# Altium PCB PCB_TUD-EHC-CrankModule_SMARTEST.pcbdoc
Units mm, origin at the board's own origin, x right, y up, seen from the top; angles counter-clockwise.
Board outline 83.4 x 42 mm, 2 copper layers (Top Layer, Bottom Layer); 64 components, 35 nets, 193 pads, 200 vias.
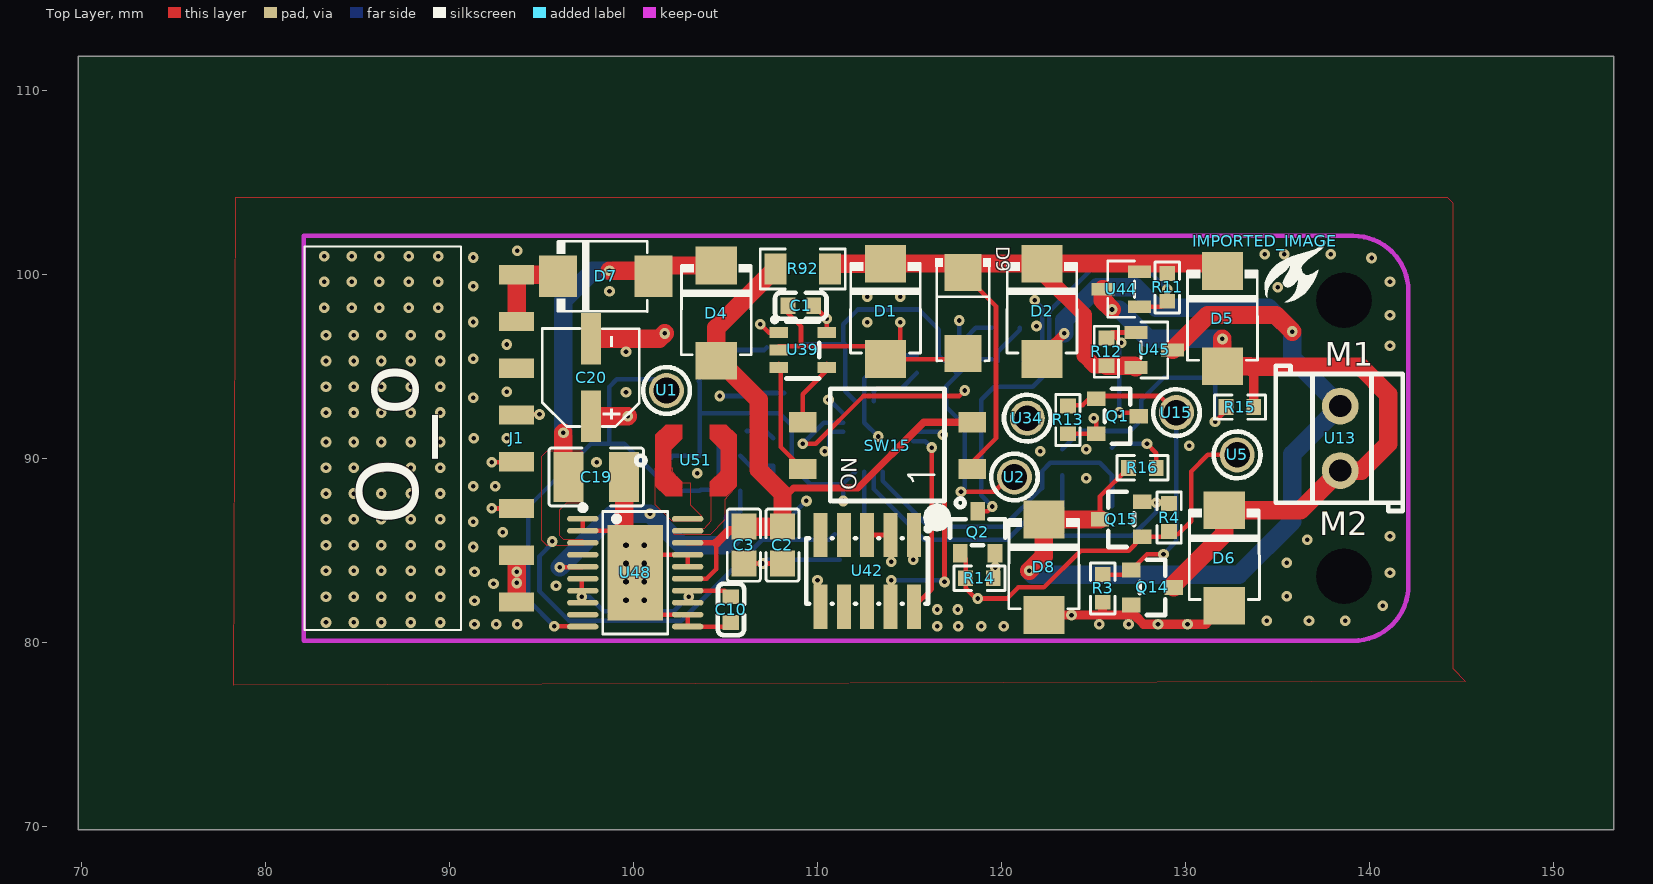
[diagram p0: Top Layer view]
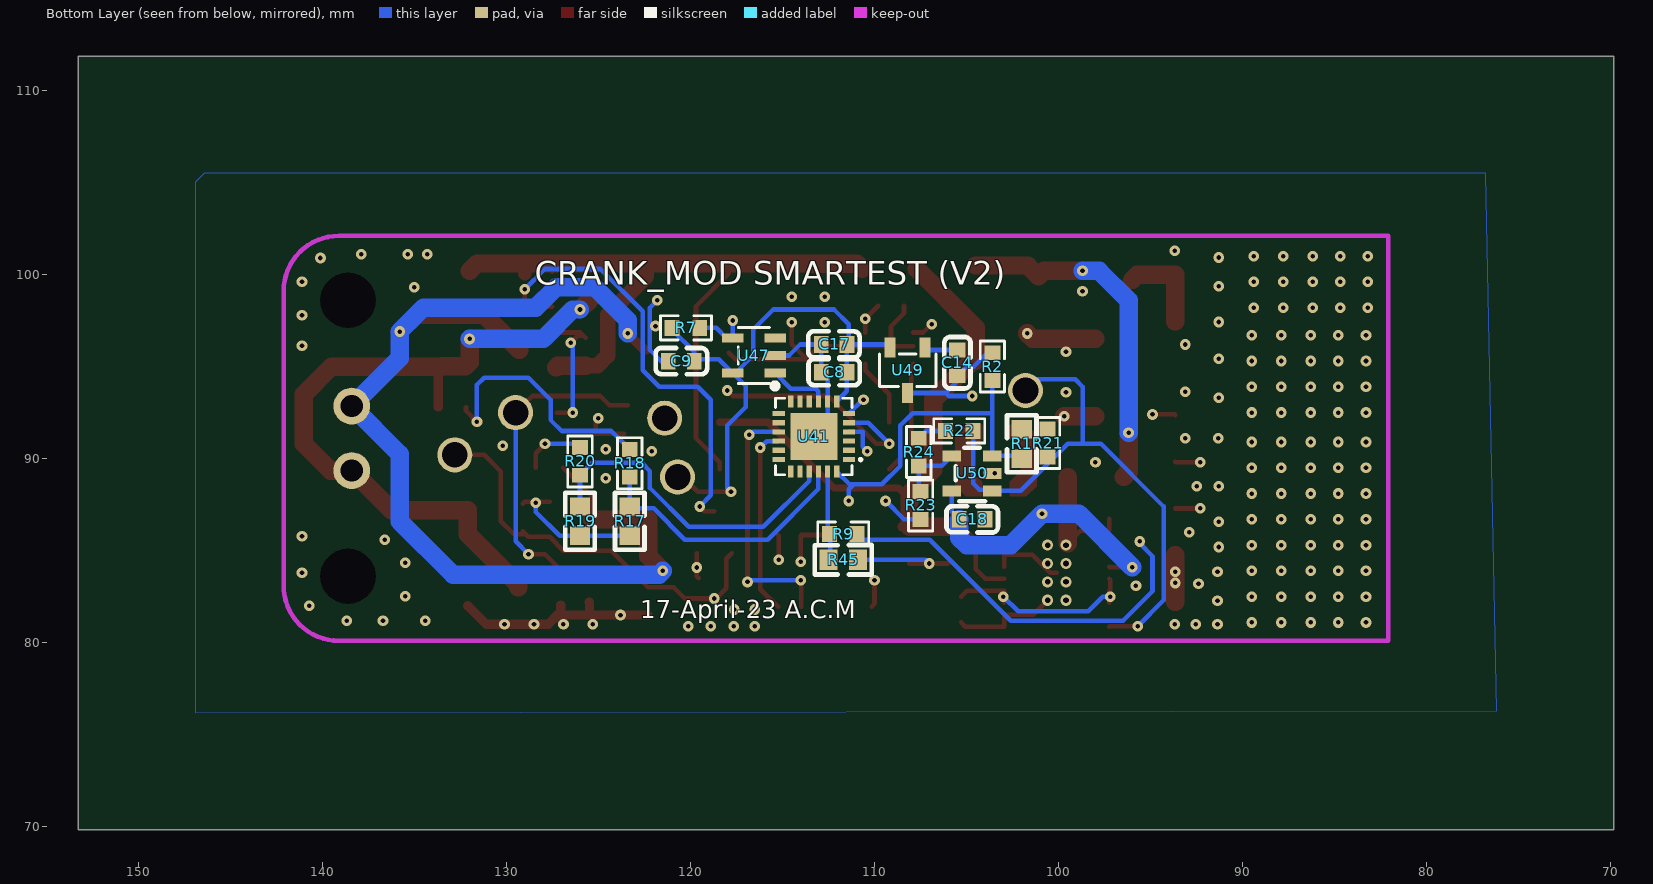
[diagram p1: Bottom Layer view, seen from below]

## Layer stack, top to bottom
Top Layer: signal copper (thickness not stored)
Dielectric: dielectric 0.32, FR-4, Dk 4.8
Bottom Layer: signal copper (thickness not stored)

## Board outline
153.25,69.85 69.85,69.85 69.85,111.85 153.25,111.85
cut-out: 140.1,98.6 ccw(c138.6,98.6) 137.1,98.6 ccw(c138.6,98.6)
cut-out: 140.1,83.6 ccw(c138.6,83.6) 137.1,83.6 ccw(c138.6,83.6)

## Components (designator, comment, footprint, x,y, rotation, side; value= is the part's Value field where it differs from the comment)
C1 "100nF" C0603 109.1,98.3 r0 top
C2 "CL21A226MAQNNNE_C45783" C0805 108.1,85.3 r90 top
C3 "CL21A226MAQNNNE_C45783" C0805 106,85.3 r90 top
C8 "100nF" C0603 112.2,94.7 r0 bottom
C9 "100nF" C0603 120.5,95.3 r0 bottom
C10 "100nF" C0603 105.3,81.8 r270 top
C14 "CL10A106MA8NRNC" C0603 105.5,95.2 r270 bottom
C17 "CL10A105KB8NNNC" C0603 112.2,96.2 r180 bottom
C18 "100nF" C0603 104.7,86.7 r0 bottom
C19 "CL32A107MQVNNNE" C1210 97.983,89 r180 top
C20 "EEEFK1A121SR" CAP-SMD_BD5.0-L5.3-W5.3-FD 97.7,94.4 r90 top
D1 "STPS1L30U" SMB_L4.3-W3.6-LS5.4-RD 113.7,98 r270 top
D2 "STPS1L30U" SMB_L4.3-W3.6-LS5.4-RD 122.2,98 r270 top
D4 "STPS1L30U" SMB_L4.3-W3.6-LS5.4-RD 104.5,97.9 r270 top
D5 "STPS1L30U" SMB_L4.3-W3.6-LS5.4-RD 132,97.6 r270 top
D6 "STPS1L30U" SMB_L4.3-W3.6-LS5.4-RD 132.1,84.6 r270 top
D7 "STPS1L30U" SMB_L4.3-W3.6-LS5.4-RD 98.5,99.9 r0 top
D8 "STPS1L30U" SMB_L4.3-W3.6-LS5.4-RD 122.3,84.1 r270 top
D9 "SMAZ5V6-13-F" SMA_L4.3-W2.6-LS5.2-RD 117.909,97.909 r270 top
IMPORTED_IMAGE "IMPORTED_IMAGE" IMPORTED_IMAGE 134.3,101.8 r0 top
J1 "SMH-108-02-G-S-TR" SMH-108-02-XX-S-TR 93.657,91.1 r270 top
Q1 "BSS806NEH6327" SOT-23_L2.9-W1.3-P1.90-LS2.4-BR 126.3,92.3 r180 top
Q2 "BSS806NEH6327" SOT-23_L2.9-W1.3-P1.90-LS2.4-BR 118.7,86 r270 top
Q14 "BSS806NEH6327" SOT-23_L2.9-W1.3-P1.90-LS2.4-BR 128.2,83 r180 top
Q15 "BSS806NEH6327" SOT-23_L2.9-W1.3-P1.90-LS2.4-BR 126.5,86.7 r0 top
R1 "20kΩ" R0603#1 102,90.8 r90 bottom
R2 "0603WAF1003T5E" R0603#2 103.6,95 r90 bottom
R3 "0603WAF1003T5E" R0603#2 125.5,82.947 r90 top
R4 "0603WAF1003T5E" R0603#2 129.1,86.8 r270 top
R7 "0603WAF1003T5E" R0603#2 120.247,97.1 r180 bottom
R9 "0603WAF1003T5E" R0603#2 111.7,85.9 r180 bottom
R11 "0603WAF1003T5E" R0603#2 129,99.3 r90 top
R12 "0603WAF1003T5E" R0603#2 125.7,95.8 r270 top
R13 "0603WAF1003T5E" R0603#2 123.6,92.1 r90 top
R14 "0603WAF1003T5E" R0603#2 118.8,83.5 r180 top
R15 "0603WAF1003T5E" R0603#2 132.947,92.8 r180 top
R16 "0603WAF1003T5E" R0603#2 127.653,89.5 r180 top
R17 "20kΩ" R0603#1 123.3,86.6 r270 bottom
R18 "0603WAF1003T5E" R0603#2 123.3,89.747 r90 bottom
R19 "20kΩ" R0603#1 126,86.6 r270 bottom
R20 "0603WAF1003T5E" R0603#2 126,89.847 r90 bottom
R21 "0603WAF1003T5E" R0603#2 100.6,90.847 r90 bottom
R22 "0603WAF1003T5E" R0603#2 105.4,91.5 r0 bottom
R23 "0603WAF1003T5E" R0603#2 107.5,87.453 r270 bottom
R24 "0603WAF1003T5E" R0603#2 107.6,90.353 r270 bottom
R45 "20kΩ" R0603#1 111.7,84.5 r180 bottom
R92 "1206W3F500MT5E_C127691" R1206 109.2,100.3 r0 top
SW15 "A6S-2102-PH" SW-SMD_4P-L6.3-W6.1-P2.54-LS10.0-BL 113.8,90.7 r90 top
U1 "5001" TEST-TH_BD2.54-P1.39 101.8,93.7 r0 top
U2 "5001" TEST-TH_BD2.54-P1.39 120.7,89 r0 top
U5 "5001" TEST-TH_BD2.54-P1.39 132.8,90.2 r0 top
U13 "KF350-3.5-2P" CONN-TH_P3.50_KF350-3.5-2P 138.4,91.1 r90 top
U15 "5001" TEST-TH_BD2.54-P1.39 129.5,92.5 r0 top
U34 "5001" TEST-TH_BD2.54-P1.39 121.4,92.2 r0 top
U39 "INA180A3IDBVR" SOT-23-5_L3.0-W1.7-P0.95-LS2.8-BR 109.2,95.9 r180 top
U41 "NHS3152/A1Z" QFN-24_L4.0-W4.0-P0.50-BL-EP2.6 113.3,91.2 r90 bottom
U42 "20021121-00010T4LF" HDR-SMD_10P-P1.27-V-M-R2-C5-S1.27-LS5.5 112.7,83.9 r180 top
U44 "FDN340P_C3277832" SOT-23-3_L2.9-W1.3-P0.95-LS2.4-BR 126.5,99.2 r0 top
U45 "FDN340P_C3277832" SOT-23-3_L2.9-W1.3-P0.95-LS2.4-BR 128.3,95.9 r180 top
U47 "TPS3825-33DBVT" SOT-23-5_L3.0-W1.7-P0.95-LS2.8-BL 116.554,95.6 r90 bottom
U48 "LTC3106IFE#PBF" TSSOP-20_L6.5-W4.4-P0.65-LS6.4-BL-EP 100.1,83.8 r270 top
U49 "MCP1700T-3302E/TT" SOT-23-3_L2.9-W1.6-P1.90-LS2.8-BR 108.2,94.8 r90 bottom
U50 "MCP6041T-E/OT" SOT-23-5_L2.9-W1.6-P0.95-LS2.8-BR 104.7,89.2 r180 bottom
U51 "Ind-LPS4018" LPS4018-223MRB 103.4,89.9 r0 top

## Footprints (in the part's own frame and the unit in brackets; to place one, negate y for a bottom-side part, rotate by r counter-clockwise, add the part's x,y. Pads: shape width x height; smd on the part's side, far side on the other; paste and mask are expansions set on the pad)
C0603 [mm]
  rect 0.8x0.9 smd paste+0 mask+0.051: 1(-0.7,0) 2(0.7,0)
  silkscreen extent -1.41,-0.71 1.39,0.72
C0805 [mm]
  rect 1.41x1.35 smd paste-100 mask+0.051: 1(-1,0) 2(1,0)
  silkscreen extent -1.96,-0.9 1.96,0.9
C1210 [mm]
  rect 1.635x2.7 smd paste-100 mask+0.051: 1(-1.517,0) 2(1.517,0)
  silkscreen extent -2.56,-1.58 2.56,1.58
CAP-SMD_BD5.0-L5.3-W5.3-FD [mm]
  rect 2.8x1.1 smd paste+0 mask+0.051: 1(-2.1,0) 2(2.1,0)
  silkscreen extent -2.66,-2.62 2.66,2.65
CONN-TH_P3.50_KF350-3.5-2P [mm]
  round 2 hole 1.2 paste+0 mask+0.051: 1(-1.75,0) 2(1.75,0)
  silkscreen extent -3.95,-3.4 3.95,3.5
HDR-SMD_10P-P1.27-V-M-R2-C5-S1.27-LS5.5 [mm]
  rect 0.76x2.4 smd paste+0 mask+0.051: 1(-2.54,-1.95) 2(-2.54,1.95) 3(-1.27,-1.95) 4(-1.27,1.95) 5(0,-1.95) 6(0,1.95) 7(1.27,-1.95) 8(1.27,1.95) 9(2.54,-1.95) 10(2.54,1.95)
  silkscreen extent -3.43,-2.41 3.3,1.78
IMPORTED_IMAGE [mm]
  silkscreen extent 0,-3.3 3.3,0
LPS4018-223MRB [mm]
  Top Layer region: -0.755,-1.945 -1.645,-1.945 -2.205,-1.395 -2.205,1.395 -1.645,1.945 -0.755,1.945 -0.755,1.17 -1.335,0.575 -1.335,-0.575 -0.755,-1.17
  Top Layer region: 0.755,1.945 1.645,1.945 2.205,1.395 2.205,-1.395 1.645,-1.945 0.755,-1.945 0.755,-1.17 1.335,-0.575 1.335,0.575 0.755,1.17
  silkscreen extent -3.25,-0.25 -2.75,0.25
QFN-24_L4.0-W4.0-P0.50-BL-EP2.6 [mm]
  rect 0.28x0.665 smd paste-100 mask+0.05: 1(-1.25,-1.908) 2(-0.75,-1.908) 3(-0.25,-1.908) 4(0.25,-1.908) 5(0.75,-1.908) 6(1.25,-1.908) 13(1.25,1.908) 14(0.75,1.908) 15(0.25,1.908) 16(-0.25,1.908) 17(-0.75,1.908) 18(-1.25,1.908)
  rect 0.665x0.28 smd paste-100 mask+0.05: 7(1.908,-1.25) 8(1.908,-0.75) 9(1.908,-0.25) 10(1.908,0.25) 11(1.908,0.75) 12(1.908,1.25) 19(-1.908,1.25) 20(-1.908,0.75) 21(-1.908,0.25) 22(-1.908,-0.25) 23(-1.908,-0.75) 24(-1.908,-1.25)
  rect 2.55x2.55 smd paste-100 mask+0.05: 25(0,0)
  silkscreen extent -2.08,-2.61 2.08,2.08
R0603#1 [mm]
  rect 1x1.1 smd paste+0 mask+0.051: 1(-0.8,0) 2(0.8,0)
  silkscreen extent -1.55,-0.8 1.55,0.81
R0603#2 [mm]
  rect 0.806x0.864 smd paste-100 mask+0.051: 1(-0.753,0) 2(0.753,0)
  silkscreen extent -1.39,-0.66 1.39,0.66
R1206 [mm]
  rect 1.208x1.701 smd paste-100 mask+0.051: 1(-1.479,0) 2(1.479,0)
  silkscreen extent -2.31,-1.08 2.31,1.08
SMA_L4.3-W2.6-LS5.2-RD [mm]
  rect 2x2 smd paste+0 mask+0.051: 1(-2.2,0) 2(2.2,0)
  silkscreen extent -2.98,-1.5 2.6,1.5
SMB_L4.3-W3.6-LS5.4-RD [mm]
  rect 2.047x2.241 smd paste+0 mask+0.051: 1(-2.591,0) 2(2.591,0)
  silkscreen extent -2.67,-1.91 2.26,1.91
SMH-108-02-XX-S-TR [mm]
  rect 1.04x1.91 smd paste+0 mask+0.051: 1(-8.89,0) 2(-6.35,0) 3(-3.81,0) 4(-1.27,0) 5(1.27,0) 6(3.81,0) 7(6.35,0) 8(8.89,0)
  silkscreen extent -10.42,-11.53 10.42,-3.02
SOT-23-3_L2.9-W1.3-P0.95-LS2.4-BR [mm]
  rect 1.25x0.7 smd paste+0 mask+0.051: 1(1,-0.95) 2(1,0.95) 3(-1,0)
  silkscreen extent -0.73,-1.53 0.73,1.53
SOT-23-3_L2.9-W1.6-P1.90-LS2.8-BR [mm]
  rect 1.07x0.6 smd paste+0 mask+0.051: 1(1.235,-0.95) 2(1.235,0.95) 3(-1.235,0)
  silkscreen extent -0.88,-1.54 0.88,1.54
SOT-23-5_L2.9-W1.6-P0.95-LS2.8-BR [mm]
  rect 1x0.6 smd paste+0 mask+0.05: 1(1.1,-0.95) 2(1.1,0) 3(1.1,0.95) 4(-1.1,0.95) 5(-1.1,-0.95)
  silkscreen extent -0.89,-1.52 0.7,1.4
SOT-23-5_L3.0-W1.7-P0.95-LS2.8-BL [mm]
  rect 0.49x1.157 smd paste+0 mask+0.051: 1(-0.95,-1.154) 2(0,-1.154) 3(0.95,-1.154)
  rect 0.49x1.175 smd paste+0 mask+0.051: 4(0.95,1.154) 5(-0.95,1.154)
  silkscreen extent -1.8,-1.29 1.53,0.85
SOT-23-5_L3.0-W1.7-P0.95-LS2.8-BR [mm]
  rect 1x0.6 smd paste+0 mask+0.051: 1(1.3,-0.95) 2(1.3,0) 3(1.3,0.95) 4(-1.3,0.95) 5(-1.3,-0.95)
  silkscreen extent -0.9,-1.78 1.65,1.55
SOT-23_L2.9-W1.3-P1.90-LS2.4-BR [mm]
  rect 1x0.8 smd paste+0 mask+0.051: 1(1.15,-0.95) 2(1.15,0.95) 3(-1.15,0)
  silkscreen extent -0.7,-1.5 0.7,1.5
SW-SMD_4P-L6.3-W6.1-P2.54-LS10.0-BL [mm]
  rect 1.1x1.5 smd paste+0 mask+0.05: 1(-1.27,-4.6) 2(1.27,-4.6) 3(1.27,4.6) 4(-1.27,4.6)
  silkscreen extent -3.34,-4.19 3.1,3.1
TEST-TH_BD2.54-P1.39 [mm]
  round 1.9 hole 1.39 paste+0 mask+0.051: 1(0,0)
  silkscreen extent -1.27,-1.27 1.27,1.27
TSSOP-20_L6.5-W4.4-P0.65-LS6.4-BL-EP [mm]
  oval 0.308x1.706 smd paste+0 mask+0.051: 1(-2.925,-2.848) 2(-2.275,-2.848) 3(-1.625,-2.848) 4(-0.975,-2.848) 5(-0.325,-2.848) 6(0.325,-2.848) 7(0.975,-2.848) 8(1.625,-2.848) 9(2.275,-2.848) 10(2.925,-2.848) 11(2.925,2.848) 12(2.275,2.848) 13(1.625,2.848) 14(0.975,2.848) 15(0.325,2.848) 16(-0.325,2.848) 17(-0.975,2.848) 18(-1.625,2.848) 19(-2.275,2.848) 20(-2.925,2.848)
  rect 5.2x3 smd paste+0 mask+0.051: 21(0,0)
  silkscreen extent -3.68,-3 3.33,1.77

## Via types
v1: diameter 0.579, hole 0.25, Top Layer to Bottom Layer, 134 vias
v2: diameter 0.58, hole 0.25, Top Layer to Bottom Layer, 58 vias
v3: diameter 0.61, hole 0.305, Top Layer to Bottom Layer, 8 vias

## Nets (pads, with @x,y where several pads share a name; then routed paths per layer and width w, separated by ;. In a path a pad name is that pad's centre, name@x,y a point inside that pad or via, vN(x,y) a via of type N, cw(c..) or ccw(c..) an arc to the next point about the centre after c; other vN are vias at no path point)
$1N35971: D5.2 D6.1 Q14.3 R15.1 U13.1 U44.3 | length 39.4
  Top Layer w0.5: R15.1 133.7,94.807
  Top Layer w1: U44.3 125.5,98.6 v2(126,98.1) ; Q14.3 129.35,83.15 132.1,85.9 D6.1 136.241,87.191 U13.1 139.55,89.35 141,90.8 141,93.5 139.5,95 133.507,95 133.499,95.009 132.229,95.009 132,95.238 v2(132,96.5)
  Bottom Layer w1: v2(126,98.1) 126.4,98.1 128,96.5 v2(132,96.5)
$1N36002: D2.2 D8.1 Q15.3 R16.2 U13.2 U45.3 | length 61.5
  Top Layer w0.248: Q15.3 125.35,87.95 R16.2
  Top Layer w0.5: D2.2@122.4,95.9 122.5,95.9 v2(123.4,96.8)
  Top Layer w1: v2(121.5,83.9) 122.3,84.7 D8.1 125.341,86.691 Q15.3 ; U45.3 131.2,97.8 134.9,97.8 v2(135.8,96.9)
  Bottom Layer w1: v2(121.5,83.9) 121.7,83.7 132.9,83.7 135.8,86.6 135.8,90.25 U13.2 135.8,95.45 v2(135.8,96.9) 134.5,98.2 128.4,98.2 127.3,99.3 125.192,99.3 123.4,97.508 v2(123.4,96.8)
$1N54264: U48.20
$1N54389: U48.19
$1N63720: R21.1 R22.1 U1.1 U48.10 U50.1 | length 31.5
  Top Layer w0.248: v2(95.7,80.9) 97.227,80.9 U48.10
  Bottom Layer w0.248: v2(95.7,80.9) 94.3,82.3 94.3,87.4 97.7,90.8 98.586,90.8 99.5,90.8 102.05,88.25 U50.1 103.65,88.3 104.3,88.3 104.647,88.647 R22.1@104.647,91.5
  Bottom Layer w0.249: 98.586,90.8 98.7,90.914 98.7,93.9 99.1,94.3 101.4,94.3 U1.1@102.1,93.6
$1N65040: R23.1 R24.2 U50.4 | length 3.5
  Bottom Layer w0.248: U50.4 106.35,89.6 R24.2 107.6,88.307 R23.1
$1N65366: R22.2 R24.1 | length 1.6
  Bottom Layer w0.248: R22.2 107.207,91.5 R24.1
$1N84527: SW15.3 U39.4 | length 3.7
  Top Layer w0.248: SW15.3 109.2,93.499 110.5,94.799 U39.4@110.5,95.15
$1N84852: SW15.4 U39.3 | length 6.3
  Top Layer w0.248: U39.3@107.9,95.15 108,95.05 108,90.63 SW15.4
$2N915: R9.1 R45.1 U41.23 | length 4.6
  Bottom Layer w0.248: R45.1@112.4,84.793 112.4,85.847 R9.1 112.55,85.997 U41.23
$2N4063: U41.9 U47.1 | length 3.3
  Bottom Layer w0.248: U41.9 113.05,93.65 113.2,93.8 114.55,93.8 U47.1
CONN_IN: D1.1 D2.1 D5.1 D9.1 R11.2 R12.2 R92.2 SW15.1 U44.2 U45.2 | length 43.2
  Top Layer w0.248: D9.1@117.909,100.059 119.7,98.269 119.7,91.1 118.4,89.8 SW15.1 ; 127.146,100.6 127.5,100.246 U44.2
  Top Layer w0.75: R11.2 129,100.469 129.131,100.6
  Top Layer w0.85: D2.1@122.4,100.091 122.4,99.9 124.5,97.8 124.5,95.6 125.053,95.047 R12.2
  Top Layer w1: R92.2 110.97,100.591 D1.1 113.709,100.6 127.146,100.6 129.131,100.6 131.591,100.6 D5.1 ; R12.2 127.203,95.047 U45.2
CRANK_OK: J1.4 U41.4 | length 25.9
  Top Layer w0.248: J1.4 93.687,92.4 v2(94.9,92.4)
  V+ w0.248: v2(94.9,92.4) 97.739,95.239 110.061,95.239 112.1,93.2 112.1,92.1 v2(110.4,90.4)
  Bottom Layer w0.248: v2(110.4,90.4) 110.65,90.65 110.65,91.45 U41.4
CRANK_STOR: C19.2 D4.1 D7.2 R9.2 U48.3 | length 40.7
  Top Layer w1: v2(96.2,91.4) 96.2,89.265 C19.2 ; v2(98.7,100.2) 100.791,100.2 D7.2 101.683,100.491 D4.1
  Bottom Layer w0.248: v2(95.6,85.5) 95.6,85.4 94.9,84.7 94.9,82.8 96.5,81.2 102.6,81.2 107,85.6 110.647,85.6 R9.2
  Bottom Layer w1: v2(96.2,91.4) 96.2,98.6 97.8,100.2 v2(98.7,100.2)
CURR_SENSE: J1.6 U39.1 | length 24.1
  Top Layer w0.248: v2(92.3,87.3) 92.31,87.29 J1.6 ; v2(106.9,97.3) 107.35,96.85 U39.1
  V+ w0.248: v2(92.3,87.3) 93.9,88.9 93.9,93.6 97.7,97.4 106.8,97.4 v2(106.9,97.3)
GND: C1.1 C2.1 C3.1 C8.2 C9.2 C10.2 C14.1 C17.1 C18.1 C19.1 C20.2 D1.2 D6.2 D8.2 D9.2 J1.7 J1.8 Q1.2 Q2.2 Q14.2 Q15.2 R1.2 R3.1 R4.1 R13.1 R14.1 R17.2 R19.2 R21.2 R23.2 R45.2 U39.2 U41.8 U41.25 U42.3 U42.5 U47.2 U48.1 U48.2 U48.11 U48.12 U48.16 U48.17 U48.21 U49.1 U50.2 | length 87
  Top Layer w0.248: U48.1 U48.2 98.825,86.075 99.5,85.4 U48.21@99.6,85.3 ; U48.21 100.451,83.8 101.426,84.775 U48.17 U48.16 ; U48.21@100.6,82.3 101.375,81.525 U48.12 U48.11 105.075,80.875 C10.2 ; C3.1 v2(107.031,84.3) C2.1 ; U39.2@107.9,96.1 109.106,96.1 ; C1.1 108.4,97.9 109.106,97.193 109.106,96.1 ; U42.5 U42.3 114,85.82 v2(114,84.4) ; v2(114.5,97.4) 114.5,96.209 D1.2 ; D9.2@117.909,95.759 117.559,95.409 D1.2 ; R14.1 119.65,83.597 v2(119.65,84.085) Q2.2@119.65,84.85 ; R13.1 125.147,91.347 Q1.2 125.15,92.05 v2(125,92.2) ; Q15.2 v2@128.426,87.65 ; v2(128.4,87.6) 128.4,87.624 v2@128.426,87.65 ; R4.1 129.003,87.65 v2@128.426,87.65 ; 109.106,96.1 113.009,96.1 D1.2
  Top Layer w0.5: D8.2 122.309,81.5 v2(123.8,81.5) 125.483,81.5 ; R3.1 125.483,82.176 125.483,81.5 ; Q14.2 127.05,81.669 127.219,81.5 ; D6.2 131.091,81 v1(130.1,81) v2(128.5,81) 127.719,81 127.219,81.5 ; 125.483,81.5 127.219,81.5
  Top Layer w1: J1.8 v2(93.657,83.245) v2(93.657,83.861) J1.7 ; C20.2@98,96.5 101.4,96.5 v2(101.7,96.8) ; U48.21@99.5,85.4 C19.1
  Bottom Layer w0.248: C14.1 107.115,95.9 U49.1 ; v2(107.031,84.3) 107.231,84.5 R45.2@111.2,84.5 ; R23.2 108.4,86.7 v2(109.4,87.7) ; v2(113.3,91.2) 112.55,91.95 U41.8 112.55,94.35 C8.2 C17.1 114.047,96.2 114.647,95.6 U47.2 ; C9.2 121.6,95.3 122.2,95.9 122.2,98.2 v2(121.8,98.6) ; R17.2 R19.2 127.1,85.8 128.4,87.1 v2(128.4,87.6)
  other v1: 116.5,80.9 117.649,80.9 118.901,80.9 120.125,80.9 91.368,81 92.544,81 93.7,81 83.3,81.1 84.8,81.1 86.3,81.1 87.9,81.1 89.5,81.1 134.4,81.2 136.7,81.2 138.665,81.2 116.5,81.8 117.622,81.8 140.7,82 91.368,82.281 83.3,82.5 84.8,82.5 86.3,82.5 87.9,82.5 89.5,82.5 135.5,82.524 95.8,83.1 92.4,83.2 92.4,83.2 141.1,83.8 91.368,83.849 83.3,83.9 84.8,83.9 86.3,83.9 87.9,83.9 89.5,83.9 135.5,84.334 91.3,85.2 83.3,85.3 84.8,85.3 86.3,85.3 87.9,85.3 89.5,85.3 136.6,85.6 141.1,85.773 92.9,86 91.3,86.565 83.3,86.7 84.8,86.7 86.3,86.7 87.9,86.7 89.5,86.7 83.3,88.1 84.8,88.1 86.3,88.1 87.9,88.1 89.5,88.1 91.3,88.49 92.5,88.5 124.6,88.94 103.468,89.2 83.3,89.5 84.8,89.5 86.3,89.5 87.9,89.5 89.5,89.5 98,89.8 122.1,90.4 124.6,90.5 130.2,90.7 83.3,90.9 84.8,90.9 86.3,90.9 87.9,90.9 89.5,90.9 91.32,91.1 93.13,91.1 83.3,92.5 84.8,92.5 86.3,92.5 87.9,92.5 89.5,92.5 91.3,93.3 99.6,93.6 93.13,93.629 83.3,93.9 84.8,93.9 86.3,93.9 87.9,93.9 89.5,93.9 83.3,95.3 84.8,95.3 86.3,95.3 87.9,95.3 89.5,95.3 91.3,95.428 99.6,95.8 141.1,96.122 93.13,96.201 83.3,96.7 84.8,96.7 86.3,96.7 87.9,96.7 89.5,96.7 112.7,97.4 91.3,97.422 141.1,97.793 83.2,98.2 84.7,98.2 86.2,98.2 87.8,98.2 89.4,98.2 112.7,98.8 114.5,98.8 98.7,99.1 135,99.3 91.3,99.359 83.2,99.6 84.7,99.6 86.2,99.6 87.8,99.6 89.4,99.6 141.1,99.6 140.1,100.9 91.3,100.925 83.2,101 84.7,101 86.2,101 87.8,101 89.4,101 134.3,101.1 135.36,101.1 137.886,101.1 93.7,101.3
  other v2: 125.3,81 126.9,81 121.9,97.2
LDO_3V: C8.1 C9.1 C17.2 R7.1 U2.1 U41.7 U42.1 U47.5 U49.2 | length 36.9
  Top Layer w0.248: v2(115.2,84.5) 115.2,85.81 U42.1 ; v2(117.8,88.2) 119.6,88.2 U2.1@120.7,89.3
  V+ w0.248: v2(115.2,84.5) 117.8,87.1 v2(117.8,88.2)
  Bottom Layer w0.248: U49.2 109.315,96.2 C17.2 ; U41.7 111.5,93.657 C8.1 C17.2 ; v2(117.8,88.2) 118,88.4 118,91.8 117,92.8 117,93.943 U47.5 ; C9.1@119.5,95.4 118.457,95.4 U47.5 ; C9.1 119.8,95.8 121,97 R7.1 ; C17.2 111.4,96.3 111.4,97.3 112.2,98.1 115.5,98.1 116.6,97 116.6,95.6 117.55,94.65 U47.5
LT_AUX: C14.2 C18.2 C20.1 R2.2 U48.5 U49.3 U50.5 | length 36.5
  Top Layer w0.249: v2(96,84.1) 97.227,84.1 U48.5
  Top Layer w1: C20.1@98,92.3 v2(99.7,92.3)
  V+ w0.248: 100.9,88.9 104.7,92.7 v2(104.7,93.4)
  V+ w1: v2(99.7,92.3) 100.4,92.3 100.9,91.8 100.9,88.9 100.7,88.7 100.7,87.2 v2(100.9,87)
  Bottom Layer w0.248: R2.2 103.847,95.753 104.6,95 105,95 C14.2 ; v2(104.7,93.4) 105.97,93.4 106.135,93.565 ; C18.2 105.8,87.1 U50.5 ; C14.2@105.5,94.2 106.135,93.565 ; U49.3 106.135,93.565
  Bottom Layer w1: v2(96,84.1) 98.9,87 v2(100.9,87) 102.6,85.3 105,85.3 105.4,85.7 C18.2
LT_VCC: C10.1 U48.6 U48.7 U48.8 U48.13 U48.14 | length 11.4
  Top Layer w0.248: v2(97.2,82.5) U48.7@97.2,82.773 ; U48.8 U48.7 U48.7@97.2,82.773 ; U48.6 97.2,83.423 U48.7@97.2,82.773 ; U48.13 v2@102.948,82.575 ; v2(103,82.5) 103,82.523 v2@102.948,82.575 ; C10.1 104.975,82.825 U48.14 v2@102.948,82.575
  Bottom Layer w0.248: v2(97.2,82.5) 97.6,82.5 98.4,81.7 102.2,81.7 v2(103,82.5)
M1: Q1.1 Q14.1 R3.2 R13.2 U15.1 U41.5 | length 43.1
  Top Layer w0.248: v2(109.2,90.8) 109.9,90.8 112.5,93.4 117.7,93.4 v2(118,93.7) ; R13.2@123.4,92.9 124.4,92.9 124.9,93.4 128.6,93.4 U15.1 ; R3.2 126.8,83.7 Q14.1 127.9,84.8 v2(128.8,84.8)
  V+ w0.248: v2(118,93.7) 128.3,93.7 U15.1
  Bottom Layer w0.248: v2(109.2,90.8) 110.35,91.95 U41.5 ; v2(128.8,84.8) 129.5,85.5 U15.1
M1#: Q1.3 R12.1 U45.1 | length 7.2
  Top Layer w0.248: R12.1 R12.1@125.82,96.674 ; v2(126.4,92.5) Q1.3@127.25,92.5 ; v2(126.5,96.3) 126.126,96.674 R12.1@125.82,96.674 ; U45.1 125.996,96.85 R12.1@125.82,96.674
  Bottom Layer w0.248: v2(126.4,92.5) 126.4,96.2 v2(126.5,96.3)
M2: Q2.1 Q15.1 R4.2 R14.2 U5.1 U41.6 | length 44.1
  Top Layer w0.248: Q2.1@117.75,84.85 118.047,84.553 R14.2 118.047,82.953 118.6,82.4 120.3,82.4 120.9,83 122.3,83 124.3,85 126.9,85 Q15.1 128.803,85.75 R4.2@128.937,85.884 ; R4.2 R4.2@128.937,85.884 ; U5.1 131.2,90.2 130.3,89.3 130.3,86.6 129.584,85.884 R4.2@128.937,85.884
  V+ w0.248: v2(110.6,93.2) 108.6,91.2 108.6,83.7 109.9,82.4 v2(118.7,82.4)
  Bottom Layer w0.248: v2(110.6,93.2) 110.642,93.2 U41.6
M2#: Q2.3 R11.1 U44.1 | length 24.6
  Top Layer w0.248: Q2.3 119.25,87.15 v2(119.5,87.4) ; U44.1 128.703,98.25 R11.1 v2(129,99.2)
  Bottom Layer w0.248: v2(119.5,87.4) 118.9,88 118.9,93.2 119.6,93.9 121.7,93.9 122.6,94.8 122.6,98 124.9,100.3 127.9,100.3 v2(129,99.2)
MAIN_STOR: D7.1 J1.1 J1.2 | length 5
  Top Layer w1: J1.2 J1.1 95.719,99.99 D7.1@96.009,99.7
MPPC_INPUT: R1.1 R2.1 U34.1 U41.24 U50.3 | length 30.3
  V+ w0.248: v2(111.4,87.7) 115,87.7 119.5,92.2 U34.1
  Bottom Layer w0.248: U50.3 103.6,92.466 ; R2.1 103.553,94.2 103.6,94.154 103.6,92.466 ; v2(111.4,87.7) 111.4,88.334 111.134,88.6 ; U41.24 111.358,88.6 111.134,88.6 ; 103.6,92.466 107.934,92.466 108.6,91.8 108.6,89.6 109.6,88.6 111.134,88.6
  Bottom Layer w0.249: R1.1 102.15,90.15 U50.3
PWR_IN: C2.2 C3.2 D4.2 R92.1 SW15.2 U48.15 U48.18 | length 38.1
  Top Layer w0.248: U48.15 103.975,83.475 104.5,84 104.5,85.4
  Top Layer w0.3: U48.18 104.525,85.425
  Top Layer w0.4: 108.1,87.8 108.7,88.4 112.2,88.4 115.77,91.97 SW15.2
  Top Layer w0.5: 104.525,85.425 105.2,86.1 105.8,86.1 C3.2 ; C2.2 C2.2@108.5,86.3
  Top Layer w1: C3.2 C2.2 108.1,87.8 108.1,88.1 106.8,89.4 106.8,93.2 104.691,95.309 D4.2 104.5,97.1 107.7,100.3 R92.1
RESET: R7.2 U42.10 U47.4 | length 21.8
  Top Layer w0.248: v2(110,83.4) 110,82.11 U42.10
  V+ w0.248: v2(110,83.4) 110,89.1 117.7,96.8 v2(117.7,97.5)
  Bottom Layer w0.248: v2(117.7,97.5) 117.707,97.493 U47.4 118.058,96.55 118.608,97.1 R7.2
SENSE_1: R15.2 R18.2 | length 13.8
  Top Layer w0.248: v2(131.6,92) 132.193,92.593 R15.2
  Bottom Layer w0.248: R18.2 124.3,91.5 127,91.5 127.6,92.1 127.6,93.2 128.8,94.4 131.2,94.4 131.6,94 v2(131.6,92)
SENSE_1_MCU: R17.1 R18.1 U41.22 | length 14.8
  Bottom Layer w0.248: U41.22 113.05,88.35 115.8,85.6 120.3,85.6 122,87.3 123.2,87.3 R17.1 R18.1@123.3,89.093
SENSE_2: R16.1 R20.2 | length 3.5
  Top Layer w0.248: v2(127.9,90.8) 128.407,90.293 R16.1
  Bottom Layer w0.248: R20.2 126.2,90.8 v2(127.9,90.8)
SENSE_2_MCU: R19.1 R20.1 U41.21 | length 17.9
  Bottom Layer w0.248: U41.21 113.55,88.786 116.036,86.3 120.1,86.3 122.2,88.4 122.2,89.32 122.648,89.768 125.325,89.768 R20.1 R19.1
SWD/CLK: U41.15 U42.4 | length 14.1
  Top Layer w0.248: U42.4 113.97,83.37 v2(114,83.4) ; v2(116.8,91.3) 116.9,91.2 v2(116.9,83.3)
  Bottom Layer w0.248: v2(114,83.4) 116.8,83.4 v2(116.9,83.3) ; U41.15 116.65,91.45 v2(116.8,91.3)
SWD/IO: U41.16 U42.2 | length 10.2
  Top Layer w0.248: U42.2 116.2,82.91 v2(116.2,90.6)
  Bottom Layer w0.248: U41.16 115.85,90.95 v2(116.2,90.6)
V_SENSING: C1.2 J1.5 U39.5 | length 27.3
  Top Layer w0.248: v2(92.3,89.8) 93.627,89.8 J1.5 ; C1.2 v2(110.5,97.6) U39.5
  V+ w0.248: v2(92.3,89.8) 92.3,93.8 96.6,98.1 110,98.1 v2(110.5,97.6)
"": J1.3 U41.1 U41.2 U41.3 U41.10 U41.11 U41.12 U41.13 U41.14 U41.17 U41.18 U41.19 U41.20 U42.6 U42.7 U42.8 U42.9 U47.3 U48.4 U48.9
  other v3: 99.6,82.3 100.6,82.3 99.6,83.3 100.6,83.3 99.6,84.3 100.6,84.3 99.6,85.3 100.6,85.3

## Polygon pours and split planes (outlines as drawn)
GND on GND (solid, remove dead copper, pour order 5): 80.1,78.7 142.8,78.7 142.8,103.5 80.1,103.5
CRANK_STOR on Top Layer (solid, pour order 0): 97.252,85.591 96.209,85.591 96,85.8 96,87.224 96.389,87.613 97.214,87.613 97.252,87.65 97.252,90.353 97.2,90.4 95.3,90.4 95,90.1 95,85.6 95.3,85.3 97.271,85.3 97.273,85.298 97.273,85.57
$1N54264 on Top Layer (solid, pour order 1): 102.1,86.6 101.2,87.5 101.2,89.5 102.1,89.5 102.1,89.3 102.6,88.7 103.1,88.7 103.1,87.5 103.7,86.9 103.7,86.6
$1N54389 on Top Layer (solid, pour order 2): 102.2,85.9 104.2,85.9 105,86.7 105,87.8 105.6,88.5 105.6,90.1 105.5,90.1 104.2,88.7 104.2,86.6 103.841,86.2 102.3,86.2 102.2,86.1
GND on Bottom Layer (solid, remove dead copper, pour order 3): 76.8,105.5 146.4,105.5 146.9,105 146.9,76.2 76.2,76.3
GND on Top Layer (solid, remove dead copper, pour order 4): 78.4,104.2 144.2,104.2 144.5,103.9 144.5,78.6 145.2,77.9 78.3,77.7

## Keep-outs
Board Outline Layer:
  lines w0.254 net "": 82.1,80.101 85.201,80.1 ; 82.1,80.1 82.1,102.1 139.098,102.1 ; 85.301,80.1 139.2,80.1 ; 139.1,102.1 cw(c139.1,99.1) 142.1,99.1 142.1,83.1 ; 142.1,83.1 cw(c139.1,83.1) 139.1,80.1 ccw(c139.1,83.1) 142.1,83.1

## Silkscreen, mask and mechanical layers (free items; w line width, h text height)
Top Silkscreen Layer:
  region net "": 117.25,86.8 ccw(c116.5,86.8) 115.75,86.8 ccw(c116.5,86.8)
  text "M1" at 137.546,95.042 h1.29
  text "O_o" at 88.311,86.41 h3.35 r90
  text "M2" at 137.246,85.842 h1.29
Bottom Silkscreen Layer:
  text "CRANK_MOD SMARTEST (V2)" at 128.449,99.444 h1.3
  text "17-April-23 A.C.M" at 122.718,81.333 h0.97
Mechanical Layer:
  circle w0.025 net "": c138.6,98.6 r1.5
  circle w0.025 net "": c138.6,83.6 r1.5

## Text inside footprints (layer, text, board x,y; h text height)
SW15: Top Silkscreen Layer "ON" at 112.13,88.269 h0.84 r90